# EAGLE board DRV8824%20v2.brd (EAGLE 7.5.0)
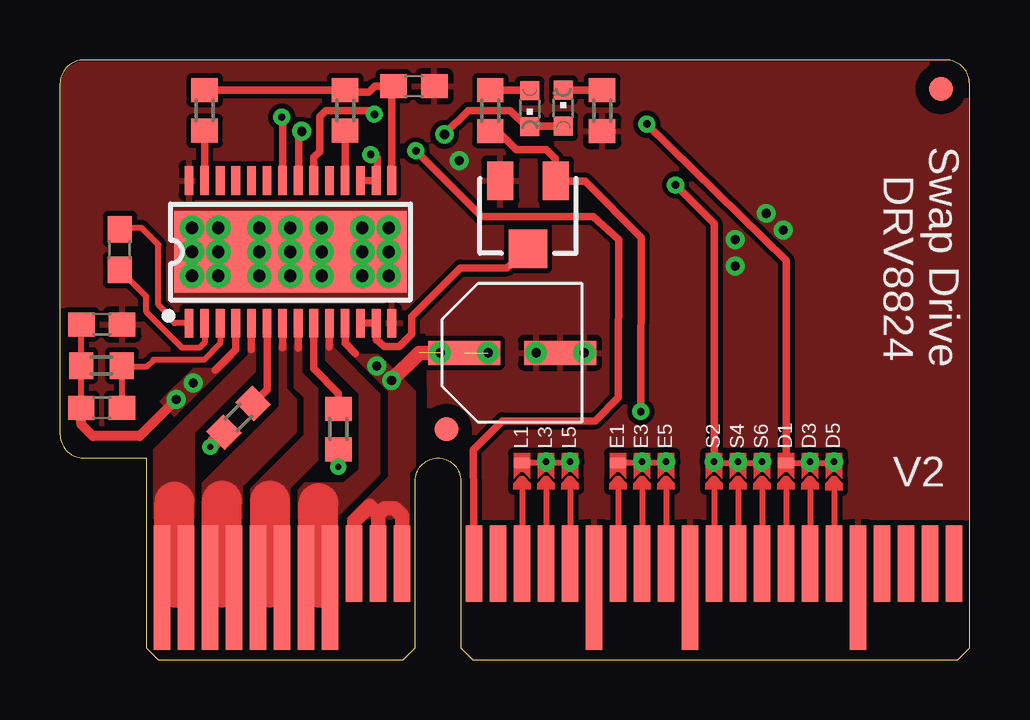
[diagram p0: board, top side]
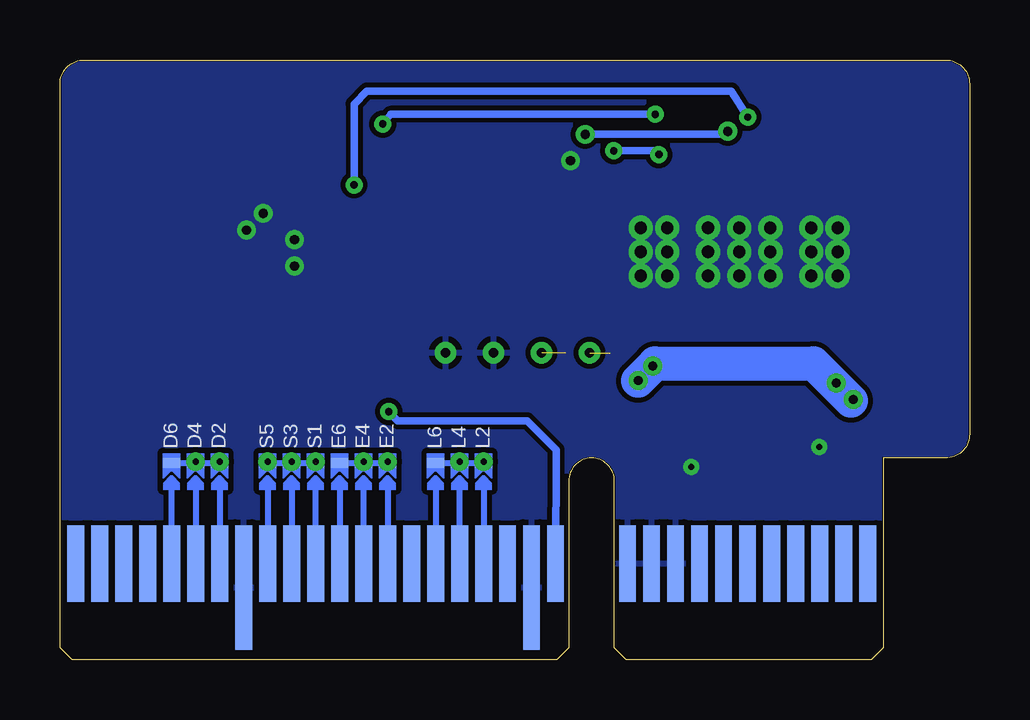
[diagram p1: board, bottom side, seen from below]

Size 37.9 x 25 mm. Coordinates in mm from the lower left corner, seen from the top.
Outline: 37.9,8.4 37.9,24 arc90 36.9,25 1,25 arc90 0,24 0,9.4 arc90 1,8.4 3.6,8.4
Copper layers (1*16): Top 0.035mm / dielectric 1.5mm / Bottom 0.035mm
Design rules "default *": minimum track width 10mil, minimum drill 24mil, track to track 8mil, track to pad 8mil, pad to pad 8mil, via to via 8mil, smd to smd 8mil, copper to edge 2mil, drill to drill 8mil, minimum pad ring 10mil, minimum via ring 8mil, stop-mask expansion 4mil, vias tented up to drill 30mil, thermal gap 10mil

## Footprints (pad centres in the part's own frame; a part is rotated, then mirrored left to right if it is on the bottom)
CHIPLED_0603 = smd 0.8 x 0.8: A 0,-0.75; C 0,0.75
C0603 = smd 1.1 x 1: 1 -0.85,0; 2 0.85,0
HTSSOP-28 = smd 0.36 x 1.19: 1 -4.225,-2.97; 2 -3.575,-2.97; 3 -2.925,-2.97; 4 -2.275,-2.97; 5 -1.625,-2.97; 6 -0.975,-2.97; 7 -0.325,-2.97; 8 0.325,-2.97; 9 0.975,-2.97; 10 1.625,-2.97; 11 2.275,-2.97; 12 2.925,-2.97; 13 3.575,-2.97; 14 4.225,-2.97; 15 4.225,2.97; 16 3.575,2.97; 17 2.925,2.97; 18 2.275,2.97; 19 1.625,2.97; 20 0.975,2.97; 21 0.325,2.97; 22 -0.325,2.97; 23 -0.975,2.97; 24 -1.625,2.97; 25 -2.275,2.97; 26 -2.925,2.97; 27 -3.575,2.97; 28 -4.225,2.97 | drill 0.508: GND@10 -4.1,1; GND@11 -4.1,0; GND@12 -4.1,-1; GND@13 -3,-1; GND@14 -3,0; GND@15 -3,1; GND@16 -1.3,1; GND@17 -1.3,0; GND@18 -1.3,-1; GND@19 0,-1; GND@20 0,0; GND@21 0,1; GND@22 1.3,1; GND@23 1.3,0; GND@24 1.3,-1; GND@25 3,-1; GND@26 3,0; GND@27 3,1; GND@28 4.1,1; GND@29 4.1,0; GND@30 4.1,-1 | smd 9.7 x 3.4: GND@PAD 0,0
R0603 = smd 1 x 1.1: 1 -0.85,0; 2 0.85,0
TRIMPOT-3MM-2 = smd 1.092 x 1.6: 1 -1.155,-1.421; 3 1.155,-1.421 | smd 1.6 x 1.6: 2 0,1.421
PCIE_64_SMART_BOARD = smd 0.7 x 3.2 bottom: GND@1 8.65,4; GND@2 9.65,4; GND@3 10.65,4; P$1 0.65,4; P$2 1.65,4; P$3 2.65,4; P$4 3.65,4; P$5 4.65,4; P$6 5.65,4; P$7 6.65,4; P$8 7.65,4; P$12 13.65,4; P$14 15.65,4; P$15 16.65,4; P$16 17.65,4; P$17 18.65,4; P$18 19.65,4; P$19 20.65,4; P$20 21.65,4; P$21 22.65,4; P$22 23.65,4; P$23 24.65,4; P$24 25.65,4; P$26 27.65,4; P$27 28.65,4; P$28 29.65,4; P$29 30.65,4; P$30 31.65,4; P$31 32.65,4; P$32 33.65,4 | smd 0.7 x 5.2 bottom: P$13 14.65,3; P$25 26.65,3 | smd 0.7 x 0.4 bottom: P$15@1 16.65,8.2; P$16@1 17.65,8.2; P$17@1 18.65,8.2; P$19@1 20.65,8.2; P$20@1 21.65,8.2; P$21@1 22.65,8.2; P$22@1 23.65,8.2; P$23@1 24.65,8.2; P$24@1 25.65,8.2; P$26@1 27.65,8.2; P$27@1 28.65,8.2; P$28@1 29.65,8.2 | smd 0.7 x 5.2: P$33 0.65,3; P$34 1.65,3; P$35 2.65,3; P$36 3.65,3; P$37 4.65,3; P$38 5.65,3; P$39 6.65,3; P$40 7.65,3; P$49 18.65,3; P$53 22.65,3; P$60 29.65,3 | drill 0.254 pad 0.305: P$41 21.65,8.25; P$42 17.65,8.25; P$43 16.65,8.25; P$65 20.65,8.25; P$66 23.65,8.25; P$67 24.65,8.25; P$68 27.65,8.25; P$69 28.65,8.25; P$70 25.65,8.25 | smd 0.7 x 3.2: P$44 13.65,4; P$45 14.65,4; P$46 15.65,4; P$47 16.65,4; P$48 17.65,4; P$50 19.65,4; P$51 20.65,4; P$52 21.65,4; P$54 23.65,4; P$55 24.65,4; P$56 25.65,4; P$57 26.65,4; P$58 27.65,4; P$59 28.65,4; P$61 30.65,4; P$62 31.65,4; P$63 32.65,4; P$64 33.65,4; VCC@1 8.65,4; VCC@2 9.65,4; VCC@3 10.65,4 | smd 0.7 x 0.4: P$46@1 15.65,8.2; P$47@1 16.65,8.2; P$48@1 17.65,8.2; P$50@1 19.65,8.2; P$51@1 20.65,8.2; P$52@1 21.65,8.2; P$54@1 23.65,8.2; P$55@1 24.65,8.2; P$56@1 25.65,8.2; P$57@1 26.65,8.2; P$58@1 27.65,8.2; P$59@1 28.65,8.2
EEEFK0J220R = smd 1 x 3: GND@1 0,-2; P$1 0,2 | drill 0.381: GND@2 0,-1; GND@3 0,-3; P$3 0,1; P$5 0,3
FIDUCIAL_1MM = smd 1 x 1: 1 0,0

## Placement (x,y rotation side)
BLU1  [CHIPLED_0603]  20.97,22.99 0 top
C3  4.7uf  [C0603]  14.75,23.9 0 top
C9  .01uf  [C0603]  2.49,17.09 90 top
C10  .1uf  [C0603]  1.74,13.98 0 top
C11  .1uf  [C0603]  1.74,10.5 0 top
DRV8824  DRV8824  [HTSSOP-28]  9.6,17 0 top
GRN1  [CHIPLED_0603]  19.58,22.96 180 top
R1  460  [R0603]  17.93,22.89 270 top
R2  10k  [R0603]  11.88,22.9 90 top
R3  10k  [R0603]  6.02,22.9 90 top
R4  .33 ohm  [R0603]  7.44,10.08 45 top
R5  .33ohm  [R0603]  11.6,9.61 90 top
R6  1m  [R0603]  1.73,12.26 0 top
R9  460  [R0603]  22.59,22.89 270 top
R22  10K  [TRIMPOT-3MM-2]  19.5,18.54 180 top
U$2  [PCIE_64_SMART_BOARD]  3.6,0 0 top
U$7  EEEFK0J220R  [EEEFK0J220R]  18.84,12.79 90 top
U$9  FIDUCIAL  [FIDUCIAL_1MM]  16.1,9.6 0 top
U$12  FIDUCIAL  [FIDUCIAL_1MM]  36.7,23.8 0 top

## Library data of the parts
BLU1 C3 C9-C11 GRN1 R1-R6 R9 U$9 U$12 = adafruit
DRV8824 U$2 U$7 = PocketNC
R22 = SparkFun-Electromechanical

## Nets
3.3V: C3.1 DRV8824.15 R2.2 R3.2
3V: R1.2 R22.1 U$2.P$12
5V: DRV8824.16 DRV8824.17 U$2.P$44
DIR: DRV8824.20 U$2.P$57@1
ENBL: BLU1.A DRV8824.21 GRN1.C
ENBL-IN: U$2.P$50@1
GND: C3.2 C10.2 DRV8824.14 DRV8824.28 DRV8824.GND@10 DRV8824.GND@11 DRV8824.GND@12 DRV8824.GND@13 DRV8824.GND@14 DRV8824.GND@15 DRV8824.GND@16 DRV8824.GND@17 DRV8824.GND@18 DRV8824.GND@19 DRV8824.GND@20 DRV8824.GND@21 DRV8824.GND@22 DRV8824.GND@23 DRV8824.GND@24 DRV8824.GND@25 DRV8824.GND@26 DRV8824.GND@27 DRV8824.GND@28 DRV8824.GND@29 DRV8824.GND@30 DRV8824.GND@PAD R4.1 R5.1 R9.2 R22.3 U$2.GND@1 U$2.GND@2 U$2.GND@3 U$2.P$13 U$2.P$25 U$2.P$49 U$2.P$53 U$2.P$60 U$7.GND@1 U$7.GND@2 U$7.GND@3
N$1: C9.2 DRV8824.1
N$2: C9.1 DRV8824.2
N$3: DRV8824.18 R2.1
N$4: DRV8824.9 R5.2
N$6: DRV8824.6 R4.2
N$9: BLU1.C R9.1
N$10: GRN1.A R1.1
N$12: DRV8824.12 DRV8824.13 R22.2
N$16: DRV8824.27 R3.1
PHASE1: DRV8824.5 U$2.P$33 U$2.P$34
PHASE2: DRV8824.7 U$2.P$35 U$2.P$36
PHASE3: DRV8824.8 U$2.P$37 U$2.P$38
PHASE4: DRV8824.10 U$2.P$39 U$2.P$40
STEP: DRV8824.22 U$2.P$22@1
VCC: C10.1 C11.1 DRV8824.4 DRV8824.11 R6.1 U$2.VCC@1 U$2.VCC@2 U$2.VCC@3 U$7.P$1 U$7.P$3 U$7.P$5
VCP: C11.2 DRV8824.3 R6.2

## Tracks (layer width: path | path; a pad name or v marks a point on that pad's centre or on a via)
3.3V
  Top 0.305: DRV8824.15 13.82,23.64 C3.1 13.12,23.9 12.87,23.65 11.98,23.65 R2.2 | 11.98,23.64 R2.2 | R2.2 R3.2
3V  (via drill 0.3)
  Top 0.305: 17.82,22.04 R1.2 18.24,22.04 19.02,21.26 20.26,21.26 20.64,20.88 20.64,19.98 R22.1 20.68,19.94 21.89,19.94 24.23,17.6 v24.2,10.34
  Bottom 0.305: U$2.P$12 17.23,8.75 18.43,9.96 23.82,9.96 v24.2,10.34
5V  (via drill 0.3)
  Top 0.305: DRV8824.17 DRV8824.16 13.23,19.92 13.23,20.93 13.1,21.06 v12.95,21.06 | U$2.P$44 17.23,8.75 18.43,9.96 22.29,9.96 23.26,10.92 23.29,17.5 22.22,18.47 17.57,18.47 v14.83,21.21
  Bottom 0.305: v14.83,21.21 13.1,21.21 v12.95,21.06
DIR  (via drill 0.3)
  Top 0.305: DRV8824.20 10.57,20.95 10.81,21.18 10.81,22.63 11.07,22.89 12.85,22.89 v13.1,22.73 | v24.45,22.33 30.25,16.63 U$2.P$57@1
  Bottom 0.305: v13.1,22.73 24.12,22.73 v24.45,22.33
ENBL  (via drill 0.38)
  Top 0.305: BLU1.A 19.58,22.24 GRN1.C 19.44,22.21 18.76,22.89 17.01,22.89 v16.02,21.9 | DRV8824.21 9.95,19.89 9.95,21.9 v10.08,22.02
  Bottom 0.305: v16.02,21.9 10.28,21.9 v10.08,22.02
GND  (via drill 0.25, 0.38)
  Top 0.305: 6.83,9.47 R4.1
  Top 0.635: v6.27,8.87 6.83,9.47 | v11.6,8.03 R5.1
  other vias: 16.63,20.8 28.13,17.5 28.13,16.4 29.43,18.6 30.13,17.9
  pour Bottom: -1.2,2.9 37.9,3 37.9,25 -1.2,24.9
  pour Top: 3.4,8.4 -1.2,8.4 -1.2,25 37.9,25 37.93,5.19 15.48,5.09 15.48,5.77 15.45,7.5 15.43,10.89 15.36,13.67 7.7,13.7 5.32,13.68 5.37,13.21 3.4,11.31
N$1
  Top 0.254: DRV8824.1 4.77,14.03 4.4,14.4 4.4,14.5 4.1,14.8 4.1,17.3 3.4,18 2.55,18 C9.2
N$2
  Top 0.254: DRV8824.2 6.03,13.22 5.8,13 5.1,13 3.6,14.5 3.6,15.13 C9.1
N$3
  Top 0.305: DRV8824.18 R2.1
N$4
  Top 0.305: DRV8824.9 10.57,12.13 11.6,11.1 R5.2
N$6
  Top 0.305: DRV8824.6 8.62,11.27 R4.2
N$9
  Top 0.305: BLU1.C R9.1
N$10
  Top 0.305: R1.1 19.58,23.74 GRN1.A
N$12
  Top 0.305: DRV8824.12 DRV8824.13 13.17,13.34 13.51,13.06 14.14,13.06 14.65,13.56 14.65,14.3 16.68,16.33 18.61,16.33 R22.2
N$16
  Top 0.305: DRV8824.27 R3.1 | R3.1
PHASE1
  Top 0.305: DRV8824.5 7.97,12.94 7.97,12.93 | U$2.P$34 4.77,3
  Top 0.61: U$2.P$33 U$2.P$34
  Top 1.676: 4.77,3 4.77,6.58
  pour Top: 7.82,13.18 7.82,12.67 3.88,8.74 3.88,5.79 5.61,5.79 5.61,9.47 8.15,12.01 8.15,13.18
PHASE2
  Top 0.305: DRV8824.7 9.28,13.02 9.26,13.01 | U$2.P$36 6.75,3
  Top 0.61: U$2.P$35 6.75,3
  Top 1.676: 6.75,3 6.75,6.63
  pour Top: 9.11,13.18 9.11,10.54 5.91,7.34 5.91,5.77 7.61,5.77 7.61,7.24 9.87,9.5 9.87,10.85 9.44,11.28 9.44,13.18
PHASE3
  Top 0.305: DRV8824.8 9.93,12.98 | U$2.P$38 8.76,3
  Top 0.61: U$2.P$37 8.76,3
  Top 1.676: 8.76,3 8.76,6.63
  pour Top: 9.75,13.18 9.75,11.35 10.15,10.95 10.15,9.35 7.92,7.11 7.92,5.79 9.59,5.79 9.59,7.16 10.76,8.33 10.76,11.28 10.1,11.94 10.1,13.18
PHASE4
  Top 0.305: DRV8824.10 11.22,13.04 11.22,13.03 | U$2.P$40 10.76,3
  Top 0.61: U$2.P$39 10.76,3
  Top 1.676: 10.76,3 10.76,6.53
  pour Top: 11.04,13.21 11.04,12.5 12.44,11.1 12.44,7.9 11.83,7.39 10.18,7.37 9.9,7.06 9.9,5.79 11.6,5.79 11.6,5.99 13.35,7.75 13.35,11.05 11.4,13 11.4,13.21
STEP  (via drill 0.3)  (1 unrouted)
  Top 0.305: DRV8824.22 9.28,22.55 v9.24,22.62 | v25.65,19.79 27.25,18.18 U$2.P$22@1
  Bottom 0.305: v9.24,22.62 9.93,23.7 25.11,23.7 25.65,23.17 v25.65,19.79
VCC  (via drill 0.38)  (2 unrouted)
  Top 0.254: C11.1 R6.1 0.88,13.97 C10.1
  Top 0.305: DRV8824.11 11.88,13.19 12.31,12.75 | DRV8824.4 7.33,12.92 6.47,12.06
  Top 0.406: v4.85,10.85 3.32,9.32 1.37,9.32 0.89,9.8 C11.1
  Top 0.61: U$2.VCC@1 12.25,5.75 12.9,6.4 13.25,6.05 | U$2.VCC@2 13.25,6.05 | U$2.VCC@3 14.25,5.99 13.94,6.3 13.5,6.3 13.25,6.05 | v13.81,11.63 14.97,12.79 U$7.P$1
  Bottom 0.305: v4.85,10.85 4.89,10.79 4.95,10.79
  Bottom 1.422: v13.81,11.63 13.1,12.34 6.5,12.34 4.95,10.79
  other vias: 13.2,12.24 5.56,11.53
  pour Top: 11.7,13.23 11.7,13.18 13.68,11.2 13.68,7.62 11.91,5.84 14.52,5.84 14.57,5.89 14.57,7.8 14.83,8.05 14.83,11.18 13.28,12.73 12.54,12.73 12.03,13.23
  pour Top: 7.03,12.83 6.37,12.14 5.56,12.14 4.16,10.77 4.77,10.13 7.26,12.62 7.21,12.65
VCP
  Top 0.254: C11.2 R6.2 2.64,12.2 3.6,12.2 3.9,12.5 6,12.5 6.68,13.18 DRV8824.3

## Text on the board
tNames: Swap Drive | DRV8824 | V2
tValues: Pocket NC